# Altium PCB 175-00008 rev 3, PCB, M2 Focus Drive.PcbDoc (part 2 of 3)
Units mil, origin at the board's own origin, x right, y up, seen from the top; angles counter-clockwise.
Board outline 6885.96 x 6885.86 mil, 9 copper layers (Top Layer (*.GTL), Mid-Layer 1 (*.G1), +24V (*.GP1), GND (*.GP2), +5V (*.GP3), +12V (*.GP4), -12V (*.GP5), +3.3V (*.GP6), Bottom Layer (*.GBL)), stack 52.6 mil thick; 158 components, 158 nets, 890 pads, 380 vias.
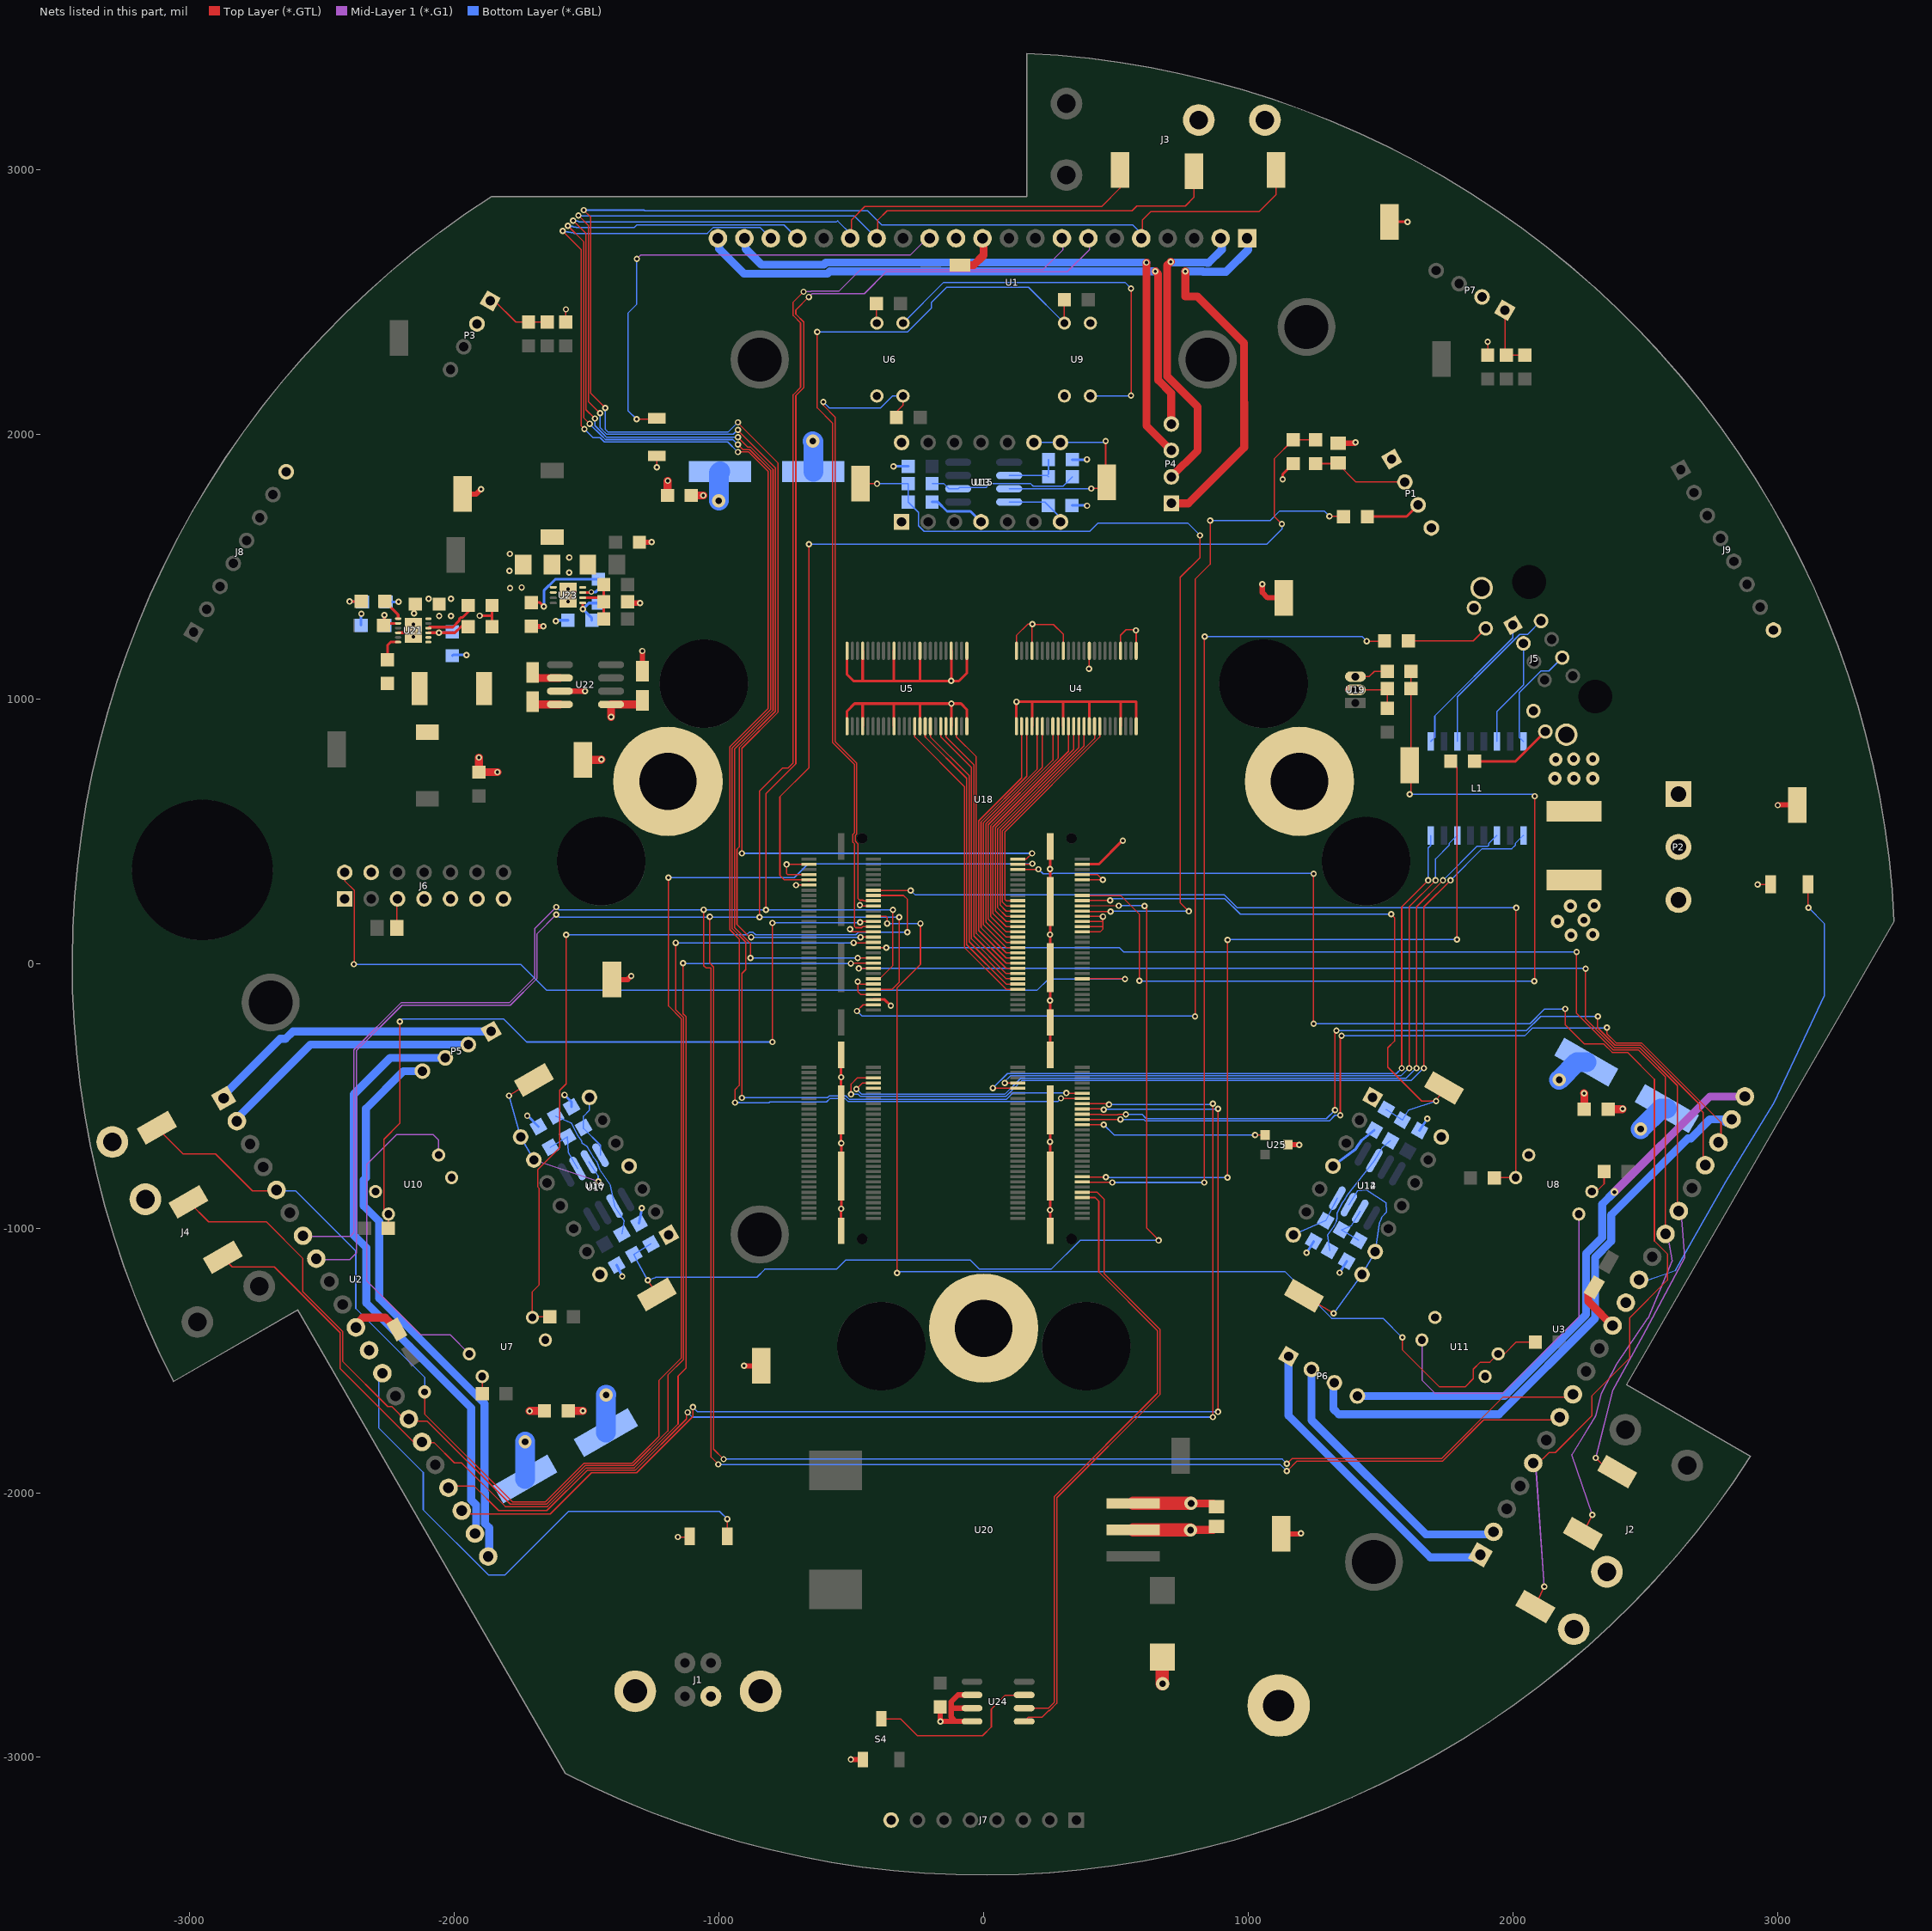
[diagram p9: the nets of this part, all layers, seen from the top]

## Via types
v1: diameter 24, hole 12, Top Layer (*.GTL) to Bottom Layer (*.GBL), 352 vias
v2: diameter 50, hole 25, Top Layer (*.GTL) to Bottom Layer (*.GBL), 22 vias
v3: diameter 25.98, hole 12.99, Top Layer (*.GTL) to Bottom Layer (*.GBL), tented top, 4 vias
v4: diameter 30, hole 15, Top Layer (*.GTL) to Bottom Layer (*.GBL), 1 vias
v5: diameter 20, hole 12, Top Layer (*.GTL) to Bottom Layer (*.GBL), 1 vias

## Nets (pads, with @x,y where several pads share a name; then routed paths per layer and width w, separated by ;. In a path a pad name is that pad's centre, name@x,y a point inside that pad or via, vN(x,y) a via of type N, cw(c..) or ccw(c..) an arc to the next point about the centre after c; other vN are vias at no path point) (continued)
+24V: C1.1 C2.1 C3.1 C4.2 C5.2 C6.2 C10.1 C15.2 C18.2 F1.2 P1.1 R29.1 R35.2 R41.2 TP16.1 U1.12 U2.12 U3.12 U18.B55 U20.1 U21.12 U23.2 | length 1185.9
  Top Layer (*.GTL) w10: U18.B55@-417.3,-135.84 -374.14,-135.84 v1(-350.98,-159) ; v1(1130,1831) 1130,1850 R41.2@1170,1890 ; TP16.1@1534.02,2804 v1(1602.02,2804)
  Top Layer (*.GTL) w30: C5.2@-1569.98,-1690 v1(-1514.98,-1690) ; C4.2@-1104.98,1770 v1(-1059.98,1770) ; v2(784.02,-2040) 867.42,-2040 C10.1@880.02,-2052.6 ; v1(2269.02,-490) 2270.02,-491 C6.2@2270.02,-550
  Top Layer (*.GTL) w50: U20.1@565.02,-2040 v2(784.02,-2040)
  Bottom Layer (*.GBL) w10: R29.1@-2007.98,1164 -2004.98,1167 v1(-1954.98,1167) ; v1(-1616.98,1295) -1613.98,1298 R35.2@-1570.98,1298
  Bottom Layer (*.GBL) w75: C2.1@-1427.4,-1771.91 -1427.4,-1630.43 v2(-1426.98,-1630) ; v2(-1000.98,1750) -1000.98,1855.18 C1.1@-996.16,1860 ; v2(2175.02,-439) 2242.11,-371.91 C3.1@2277.44,-371.91
  other v1: -2057.98,1314 -2012.98,1314 -2097.98,1379 -2012.98,1379 -1789.98,1420 -1745.98,1422 -1791.98,1485 -1790.98,1549
  other v2: 2220,107.2 2302.07,110 2169.03,160 2268.62,164 2218.11,218 2307.52,220
-12V: C16.2 C25.2 C27.2 C30.2 TP28.1 U12.7 U13.7 U14.4 U15.4 U16.7 U17.4 U18.A3 U22.5 | length 1151
  Top Layer (*.GTL) w10: U18.A3@372.86,375.97 435,375.97 524.02,465 v1(526.02,465)
  Top Layer (*.GTL) w30: TP28.1@-1514.98,770 -1446.98,770 v1(-1444.98,772) ; v1(-1407.98,933) -1408.52,933.54 U22.5@-1408.52,980 -1304.98,980 C16.2@-1289.98,995
  Bottom Layer (*.GBL) w5: U16.7@-1490.08,-505.2 -1490.08,-554.1 -1512.48,-576.5 C30.2@-1512.48,-618.97 -1512.48,-622.5 -1448.26,-686.73 U17.4@-1448.26,-723.97 ; U15.4@96.48,1745 231.02,1745 290.02,1686 U13.7@290.02,1670 ; U12.7@1170.12,-1024.81 C25.2@1292.52,-971.03 U14.4@1336.84,-886.04
CURRENT_AX1: TP1.1 U1.5 U18.A2 | length 7132.6
  Top Layer (*.GTL) w5: v1(-1511.8,2848.2) -1484.98,2821.37 -1484.98,2347 -1484.98,2155.39 v1(-1429.78,2100.19) ; v1(-928.98,2046) -928.98,2044.16 -777.98,1893.16 -777.98,1860 -777.98,1668.11 -777.98,950 -913.98,814 v1(-913.98,417) ; U18.A2@129.55,395.66 161.68,395.66 v1(183.02,417) ; U1.5@600.02,2755.89 600.02,2811 631.02,2842 1040.02,2842 1105.02,2907 TP1.1@1105.02,3000
  Bottom Layer (*.GBL) w5: v1(-1511.8,2848.2) -1283.2,2848.2 -1281,2846 -438.47,2846 -384.86,2792.39 563.52,2792.39 U1.5@600.02,2755.89 ; v1(-1429.78,2100.19) -1429.78,2019.26 -1424.25,2013.73 -1420.52,2010 -964.98,2010 v1(-928.98,2046) ; v1(-913.98,417) v1(183.02,417)
CURRENT_AX2: TP2.1 U2.5 U18.A4 | length 6413
  Top Layer (*.GTL) w5: TP2.1@-3124.98,-620 -3025.98,-719 -2902.98,-719 -2763.63,-858.35 U2.5@-2686.66,-858.35 ; v2(-2112.98,-1619) -2112.98,-1702.02 -1781,-2034 -1655.89,-2034 -1509.52,-1887.64 -1328,-1887.64 -1226.49,-1786.12 -1226.49,-1574.51 -1143.24,-1491.26 -1143.24,-207.58 -1190.98,-159.84 v1(-1190.98,325) ; U18.A4@129.55,375.97 182,375.97 v1(184.02,378)
  Bottom Layer (*.GBL) w5: U2.5@-2686.66,-858.35 -2600.65,-858.35 -2373,-1086 -2373,-1303 -2112.98,-1563.02 v2(-2112.98,-1619) ; v1(-1190.98,325) -715.98,325 -663.48,377.5 183.52,377.5 v1(184.02,378)
CURRENT_AX3: TP3.1 U3.5 U18.A6 | length 5391.2
  Top Layer (*.GTL) w5: U18.A6@129.55,356.29 206.31,356.29 v1(207.02,357) ; v1(1247.02,-227) v1(1247.02,340) ; TP3.1@2085.02,-2430 v1(2119.02,-2354) ; U3.5@2086.7,-1897.58 2136.81,-1847.48 2160.55,-1847.48 2298.02,-1710 2298.02,-1634 2442.02,-1490 2442.02,-1337.66 2584.02,-1195.66 2584.02,-1097 2535.02,-1048 2535.02,-437 2433.35,-335.33 2375.43,-335.33 2343.11,-303 2270.02,-303 2198.02,-231 v1(2198.02,-171)
  Mid-Layer 1 (*.G1) w5: U3.5@2086.7,-1897.58 v1(2119.02,-2354)
  Bottom Layer (*.GBL) w5: v1(207.02,357) 224.52,339.5 258.68,339.5 260.18,341 1246.02,341 v1(1247.02,340) ; v1(1247.02,-227) 2064.57,-227 2119.57,-172 2197.02,-172 v1(2198.02,-171)
DIRECTION1: TP7.1 U1.16 U18.B39 | length 6211.1
  Top Layer (*.GTL) w5: v1(-1551.4,2808.6) -1502.98,2760.18 -1502.98,2347 -1502.98,2094.19 v1(-1469.38,2060.6) ; v1(-928.98,1990) -890.98,1952 -880.52,1952 -795.98,1867.45 -795.98,1860 -795.98,1678.19 -795.98,957.45 -941.48,811.95 -941.48,136.33 -880.98,75.83 v1(-880.98,22) ; U1.16@-499.98,2755.89 -499.98,2811 -448.98,2862 446.02,2862 515.02,2931 TP7.1@515.02,3000 ; v1(-475.98,22) -475.62,21.64 U18.B39@-417.3,21.64
  Bottom Layer (*.GBL) w5: v1(-1551.4,2808.6) -1542.92,2808.6 -1540.72,2806.4 -1532.23,2806.4 -1530.03,2804.2 -555.89,2804.2 -552.08,2808 U1.16@-499.98,2755.89 ; v1(-1469.38,2060.6) -1469.38,2033.4 -1436.98,2001 -1425.98,1990 v1(-928.98,1990) ; v1(-880.98,22) v1(-475.98,22)
DIRECTION2: TP8.1 U2.16 U18.B41 | length 4797.8
  Top Layer (*.GTL) w5: TP8.1@-2874.98,-1110 -2874.98,-1111 -2839.98,-1146 -2680.98,-1146 -2432.16,-1394.82 -2432.16,-1530.49 -2151.68,-1810.98 -2076.02,-1810.98 -2000.16,-1886.84 -1973.16,-1886.84 -1808,-2052 -1648.43,-2052 -1502.07,-1905.64 -1320.54,-1905.64 -1154.9,-1739.99 -1154.9,-1558.45 -1125.24,-1528.79 -1125.24,-200.12 -1135.98,-189.38 v1(-1135.98,2) ; v1(-501.98,1) -501.02,1.96 U18.B41@-417.3,1.96
  Bottom Layer (*.GBL) w5: v1(-1135.98,2) -1134.98,1 v1(-501.98,1)
DIRECTION3: TP9.1 U3.16 U18.B43 | length 5038.6
  Top Layer (*.GTL) w5: v1(-471.98,-18) -471.71,-17.73 U18.B43@-417.3,-17.73 ; v1(2275.02,-19) 2275.02,-209.46 2382.89,-317.33 2478.89,-317.33 2622,-460.44 2622,-930.25 U3.16@2636.7,-944.95 ; v1(2313.02,-1868) 2365.02,-1920 TP9.1@2395.02,-1920
  Mid-Layer 1 (*.G1) w5: v1(2313.02,-1868) 2378.02,-1611 2492.02,-1405 2650.02,-1111 U3.16@2636.7,-944.95
  Bottom Layer (*.GBL) w5: v1(-471.98,-18) 2274.02,-18 v1(2275.02,-19)
DRVFAULT_AX1: U1.19 U18.A73 | length 6158
  Top Layer (*.GTL) w5: v1(-1591,2769) -1520.98,2698.98 -1520.98,2347 -1520.98,2033 v1(-1508.98,2021) ; v1(-939.98,-525) -939.98,-476 -923.98,-460 -923.98,93.38 -959.48,128.88 -959.48,819.41 -813.98,964.91 -813.98,1617 -813.98,1860 -887.98,1934 v1(-928.98,1934) ; v1(292.22,-508.8) 293.28,-509.86 U18.A73@372.86,-509.86
  Bottom Layer (*.GBL) w5: v1(-1591,2769) -1582.51,2769 -1580.31,2766.8 -1571.83,2766.8 -1569.63,2764.6 -1561.14,2764.6 -1558.94,2762.4 -1550.46,2762.4 -1548.25,2760.2 -1044.53,2760.2 -1021.58,2783.14 -845.89,2783.14 U1.19@-804.39,2741.64 ; v1(-1508.98,2021) -1476.25,1988.27 -1449.71,1988.27 -1433.43,1972 -966.98,1972 v1(-928.98,1934) ; v1(-939.98,-525) -922.14,-525 -921.64,-525.5 -811.48,-525.5 -808.48,-522.5 -593.48,-522.5 -579.78,-508.8 -524.67,-508.8 -512.17,-521.3 279.72,-521.3 v1(292.22,-508.8)
DRVFAULT_AX2: U2.19 U18.A77 | length 4732.4
  Top Layer (*.GTL) w5: U2.19@-1986.66,-2070.78 -1977.45,-2080 -1638,-2080 -1481.8,-1923.8 -1311.78,-1923.8 -1099.18,-1711.2 v1(-1099.18,-1676.2) ; U18.A77@372.86,-549.23 451.24,-549.23 v1(454.02,-552) ; v1(885.82,-548.8) 885.82,-1693.8 v1(886.02,-1694)
  Bottom Layer (*.GBL) w5: v1(-1099.18,-1676.2) -1081.38,-1694 v1(886.02,-1694) ; v1(454.02,-552) 455.32,-550.7 883.92,-550.7 v1(885.82,-548.8)
DRVFAULT_AX3: U3.19 U18.A81 | length 2984.1
  Top Layer (*.GTL) w5: U18.A81@372.86,-588.6 v1(517.02,-588.6) ; v1(1347.82,-572.8) 1347.82,-277.8 v1(1352.82,-272.8) ; v1@2355.02,-242 v1@2355.02,-243 ; v1(2356.02,-242) v1@2355.02,-243 ; U3.19@2786.7,-685.14 2786.7,-599.69 2486.35,-299.33 2390.35,-299.33 2355.02,-264 v1@2355.02,-243
  Bottom Layer (*.GBL) w5: v1(517.02,-588.6) 604.61,-588.6 610.66,-594.64 1306.02,-594.64 1327.86,-572.8 v1(1347.82,-572.8) ; v1(1352.82,-272.8) 2044.22,-272.8 2074.02,-243 2355.02,-243 v1(2356.02,-242)
EARTH: P2.3 pad.0 pad.1@0.02,-1377.97 pad.1@1193.36,688.96 pad.1@-1193.32,688.96
EMU: J6.2 U18.A47 | length 3497.1
  Top Layer (*.GTL) w5: J6.2@-2414.98,345 -2414.98,313.24 -2378.95,277.22 -2378.95,-0.98 v1(-2379.98,-2) ; U18.A47@372.86,-57.1 533.51,-57.1 v1(534.22,-57.81)
  Bottom Layer (*.GBL) w5: v1(-2379.98,-2) -2378.98,-3 -1748.91,-3 -1650.91,-101 201.57,-101 244.76,-57.81 v1(534.22,-57.81)
ETHERGND: U18.B69
ETHERLED_ACT: R17.1 U18.A103 | length 2999.1
  Top Layer (*.GTL) w5: U18.A103@372.86,-805.13 374.73,-807 v1(462.02,-807) ; v1(921.02,-808) 922.02,-807 v1(922.02,90) ; R17.1@1765.02,765 1789.02,741 v1(1789.02,91)
  Bottom Layer (*.GBL) w5: v1(462.02,-807) 463.02,-808 v1(921.02,-808) ; v1(922.02,90) 923.02,91 v1(1789.02,91)
ETHERLED_FD: R16.1 U18.A105 | length 3213.5
  Top Layer (*.GTL) w5: U18.A105@372.86,-824.82 373.54,-825.5 485.52,-825.5 486.02,-826 v1(486.02,-827) ; v1(834.02,-827) 834.02,1235 v1(835.02,1236) ; v1(1448.02,1219) 1514.02,1219 R16.1@1515.02,1220
  Bottom Layer (*.GBL) w5: v1(486.02,-827) v1(834.02,-827) ; v1(835.02,1236) 1431.02,1236 v1(1448.02,1219)
ETHERRX+: L1.11 U18.B67 | length 3268.2
  Top Layer (*.GTL) w5: v1(-480.98,-474) -457.78,-450.8 U18.B67@-417.3,-450.8 ; v1(1636.02,-395) 1636.02,215 v1(1736.02,315)
  Bottom Layer (*.GBL) w5: v1(-480.98,-474) -462.34,-492.64 80.66,-492.64 140.29,-433 1596.18,-433 1634.18,-395 v1(1636.02,-395) ; v1(1736.02,315) 1864.52,443.5 1905.21,443.5 1909.02,447.31 1909.02,454 L1.11@1940.02,485
ETHERRX-: L1.9 U18.B65 | length 3446.3
  Top Layer (*.GTL) w5: v1(-500.78,-493.8) -500.78,-454.8 -477.09,-431.11 U18.B65@-417.3,-431.11 ; v1(1664.02,-395) 1664.02,215 v1(1764.02,315)
  Bottom Layer (*.GBL) w5: v1(-500.78,-493.8) -473.91,-493.8 -466.07,-501.64 84.38,-501.64 144.02,-442 1615.18,-442 1662.18,-395 v1(1664.02,-395) ; v1(1764.02,315) 1883.52,434.5 1996.21,434.5 2009.02,447.31 2009.02,454 L1.9@2040.02,485
ETHERTX+: L1.16 U18.A70 | length 2596.4
  Top Layer (*.GTL) w5: v1(35.02,-470) 129.07,-470 U18.A70@129.55,-470.49 ; v1(1580.02,-395) 1580.02,215 v1(1680.02,315)
  Bottom Layer (*.GBL) w5: v1(35.02,-470) 90.02,-415 1560.02,-415 v1(1580.02,-395) ; v1(1680.02,315) 1680.02,437.19 1690.02,447.19 L1.16@1690.02,485
ETHERTX-: L1.14 U18.A68 | length 2560.9
  Top Layer (*.GTL) w5: v1(79.68,-451.5) 80.39,-450.8 U18.A68@129.55,-450.8 ; v1(1608.02,-395) 1608.02,215 v1(1708.02,315)
  Bottom Layer (*.GBL) w5: v1(79.68,-451.5) 79.68,-445.34 101.02,-424 1577.18,-424 1606.18,-395 v1(1608.02,-395) ; v1(1708.02,315) 1708.02,396.31 1759.02,447.31 1759.02,454 L1.14@1790.02,485
FAN_PWM: R41.1 R42.1 U18.B10 | length 3690.9
  Top Layer (*.GTL) w5: U18.B10@-660.61,316.92 -753.52,316.92 -770,333.39 -770,631 -660,741 v1(-660,1586) ; v1(1127,1662) 1098,1691 1098,1908 R41.1@1170,1980 R42.1@1255,1980
  Top Layer (*.GTL) w10: U18.B10@-661.69,318 U18.B10@-660.61,316.92
  Bottom Layer (*.GBL) w5: v1(-660,1586) 1071,1586 1127,1642 v1(1127,1662)
FAN_TACH: R19.1 U18.B57 | length 3782.9
  Top Layer (*.GTL) w5: v1(-479,-179) -455.52,-155.52 U18.B57@-417.3,-155.52 ; v1(799,-199) 799,1453 856,1510 v1(856,1675) ; v1(1307,1691) 1359.02,1691 R19.1@1360.02,1690
  Bottom Layer (*.GBL) w5: v1(-479,-179) -461,-197 797,-197 v1(799,-199) ; v1(856,1675) 1083,1675 1119,1711 1287,1711 v1(1307,1691)
FULL_STEP_AX1: U1.18 U18.A71 | length 6197.6
  Top Layer (*.GTL) w5: v1(-1571.2,2788.8) -1511.98,2729.58 -1511.98,2347 -1511.98,2063.6 v1(-1489.18,2040.8) ; v1(-928.98,1962) -909.98,1943 -884.25,1943 -804.98,1863.73 -804.98,1860 -804.98,1620.73 -804.98,961.18 -950.48,815.68 -950.48,132.61 -899.48,81.61 -899.48,-22.67 -913.98,-37.17 v1(-913.98,-507) ; v1(312.02,-489) 313.19,-490.17 U18.A71@372.86,-490.17
  Bottom Layer (*.GBL) w5: v1(-1571.2,2788.8) -1562.72,2788.8 -1560.51,2786.6 -1552.03,2786.6 -1549.83,2784.4 -1541.34,2784.4 -1539.14,2782.2 -1320.67,2782.2 -1310.72,2792.14 -754.89,2792.14 U1.18@-704.39,2741.64 ; v1(-1489.18,2040.8) -1489.18,2040.47 -1443.34,1994.63 -1429.71,1981 -947.98,1981 v1(-928.98,1962) ; v1(-913.98,-507) -913.62,-506.64 -590.34,-506.64 -583.51,-499.8 -520.94,-499.8 -508.44,-512.3 86.45,-512.3 109.75,-489 v1(312.02,-489)
FULL_STEP_AX2: U2.18 U18.A75 | length 4790.1
  Top Layer (*.GTL) w5: U2.18@-2036.66,-1984.18 -2027.48,-1975 -1925,-1975 -1833,-2067 -1650.7,-2067 -1498.5,-1914.8 -1419.98,-1914.8 -1419.82,-1914.64 -1419.65,-1914.8 -1316.98,-1914.8 -1123.32,-1721.14 -1123.32,-1700.34 v1(-1118.98,-1696) ; U18.A75@372.86,-529.54 v1@471.16,-529.54 ; v1(866.22,-1713.8) v1@866.22,-529.2
  Bottom Layer (*.GBL) w5: v1(-1118.98,-1696) -1101.18,-1713.8 v1(866.22,-1713.8) ; v1(473.82,-532.2) v1@862.82,-532.2
  other v1: 866.02,-529
FULL_STEP_AX3: U3.18 U18.A79 | length 3092.1
  Top Layer (*.GTL) w5: U18.A79@372.86,-568.91 444.77,-568.91 446.36,-570.5 507.11,-570.5 508.41,-569.2 v1(537.23,-569.2) ; v1(1328.02,-553) 1328.02,-258 v1(1333.02,-253) ; v1@2320.02,-199 v1@2320.02,-200 ; v1(2321.02,-199) v1@2320.02,-200 ; U3.18@2736.7,-771.75 2720.02,-755.06 2720.02,-563 2706.66,-549.64 2706.66,-532.37 2482.62,-308.33 2386.62,-308.33 2320.02,-241.73 v1@2320.02,-200
  Bottom Layer (*.GBL) w5: v1(537.23,-569.2) 597.95,-569.2 614.38,-585.64 1295.38,-585.64 v1(1328.02,-553) ; v1(1333.02,-253) 2051.29,-253 2105.29,-199 v1(2321.02,-199)
GND: C1.2 C2.2 C3.2 C4.1 C5.1 C6.1 C7.2 C8.2 C9.2 C10.2 C12.NEG C13.1 C14.1 C15.1 C16.1 C18.1 C19.1 C21.2 C22.1 C23.1 C24.1 C25.1 C26.1 C27.1 C28.1 C29.1 C30.1 C31.1 C32.1 C33.1 C34.1 J1.4 J1.5 J1.6 J2.1 J3.1 J4.1 J5.9 J5.11 J5.13 J5.14 J6.1 J6.4 J6.7 J6.9 J6.11 J6.13 J7.8 J8.8 J9.8 P1.4 P2.2 P3.2 P7.2 R7.1 R9.1 R13.1 R30.1 R31.1 R34.1 R38.1 R39.1 R40.1 S1.1 S2.1 S3.1 S4.1 TP21.1 TP22.1 TP23.1 TP24.1 TP25.1 TP26.1 U1.11 U2.11 U3.11 U4.1 U4.4 U4.10 U4.15 U4.21 U4.24 U4.25 U4.28 U4.34 U4.39 U4.45 U4.48 U5.1 U5.4 U5.10 U5.15 U5.21 U5.24 U5.25 U5.28 U5.34 U5.39 U5.45 U5.48 U6.E U7.E U8.E U9.E U9.K U10.E U10.K U11.E U11.K U12.1 U12.4 U13.1 U13.4 U16.1 U16.4 U18.A7 U18.A9 U18.A23 U18.A25 U18.A27 U18.A29 U18.A121 U18.A122 U18.B4 U18.B8 U18.B12 U18.B19 U18.B29 U18.B49 U18.B53 U18.B122 U19.3 U20.2 U21.4 U21.13 U22.3 U23.8 U23.9 U24.2 U24.3 U24.4 U25.3 | length 11502.2
  Top Layer (*.GTL) w5: C32.1@-1579.98,2425 -1579.98,2472 v1(-1578.98,2473) ; v1(-1234.98,1876) S1.1@-1234.98,1919 ; v1(-1155.98,-2167) -1112.98,-2167 S2.1@-1110.98,-2165 ; v1(-708.98,297) -708.74,297.23 U18.B12@-660.61,297.23 ; U18.B8@-660.61,336.6 -740.58,336.6 -744.98,341 v1(-744.98,375) -744,375.97 U18.B4@-660.61,375.97 ; v1@-507.98,130 -498.05,120.07 U18.B29@-417.3,120.07 ; v1(-467.98,221.5) -467.98,220 -466.47,218.49 U18.B19@-417.3,218.49 ; U18.B53@-417.3,-116.15 -464.83,-116.15 -475.98,-105 v1(-475.98,-68) -467.2,-76.78 U18.B49@-417.3,-76.78 ; U4.48@123.64,1182.71 123.64,1240.64 166,1283 v1(184,1283) v1@183,1282 ; U4.45@182.7,1182.71 182.7,1281.7 v1@183,1282 ; U4.39@300.81,1182.71 300.81,1245.19 264,1282 v1@183,1282 ; U18.A29@372.86,120.07 440.09,120.07 451.02,131 v1(451.02,178) 451.02,179 450.9,179.12 U18.A23@372.86,179.12 ; U18.A27@372.86,139.75 450.77,139.75 ; U18.A25@372.86,159.44 450.58,159.44 ; U18.A9@372.86,316.92 449.94,316.92 v1(450.02,317) 430.42,336.6 U18.A7@372.86,336.6 ; v1(398,1115) 399.23,1116.23 U4.34@399.23,1182.71 ; U4.28@517.34,1182.71 517.34,1241.34 538,1262 v1@575,1262 ; v1(576,1260) 576.4,1259.6 U4.25@576.4,1182.71 ; U19.3@1405.02,1085 1457.02,1085 1477.02,1105 C31.1@1525.02,1105 ; C33.1@1905.02,2300 v1(1905.02,2350) ; v1(2925.02,299) 2926.02,300 S3.1@2974.02,300
  Top Layer (*.GTL) w10: U21.4@-2212.98,1250.85 -2164.75,1250.85 U21.13@-2155.89,1259.71 ; v1(-1904.98,1315) -1857.98,1315 ; R30.1@-1857.98,1274 -1857.98,1315 ; R31.1@-1857.98,1354 -1857.98,1315 ; U18.B122@-538.96,-1009.66 v1(-538.98,-926) -537.98,-925 v1(-537.98,-678) -538.98,-677 v1(-538.98,-429) ; v1(-538.98,-429) U18.B122@-538.96,-344.7 ; U5.1@-516.36,897.28 -516.36,954.62 -487.98,983 v1(-121.98,983) ; U5.48@-516.36,1182.71 -516.36,1092.38 -491.98,1068 -93.98,1068 -63.6,1098.38 U5.25@-63.6,1182.71 ; U5.4@-457.3,897.28 -457.3,981.67 ; -457.3,1069.67 U5.45@-457.3,1182.71 ; U5.10@-339.19,897.28 -339.19,980.21 ; -339.19,1068.78 U5.39@-339.19,1182.71 ; U5.15@-240.77,897.28 -240.77,980.78 ; -240.77,1069.21 U5.34@-240.77,1182.71 ; U5.21@-122.66,897.28 -122.66,982.32 v1(-121.98,983) ; v1(-122.66,1068.67) U5.28@-122.66,1182.71 ; U5.24@-63.6,897.28 -63.6,960.62 -85.98,983 v1(-121.98,983) ; U4.1@123.64,897.28 v1(123.64,990) 182.7,990 ; U4.4@182.7,897.28 182.7,990 ; U18.A122@251.02,-1009.48 v1(251.02,-931) v1(251.02,-673) 251.2,-672.82 U18.A122@251.2,-552.18 ; U18.A121@251.02,-14.6 v1(251.02,110) v1(251.02,358) 251.2,358.18 U18.A121@251.2,442.7 ; U18.A122@251.2,-344.7 251.02,-344.52 v1(251.02,-139) 251.2,-138.82 U18.A121@251.2,-14.78 ; U4.10@300.81,897.28 300.81,990 ; U4.15@399.23,897.28 399.23,990 ; U4.21@517.34,897.28 517.34,990 ; U4.24@576.4,897.28 576.4,990 517.34,990 ; 182.7,990 300.81,990 ; 300.81,990 399.23,990 ; 399.23,990 517.34,990
  Top Layer (*.GTL) w20: TP26.1@-1969.98,1775 -1917.98,1775 v1(-1899.98,1793) ; R40.1@-1709.98,1275 v1(-1663.98,1275) ; U22.3@-1601.44,1030 v1(-1506.98,1030) ; TP21.1@-1404.98,-60 -1344.98,-60 v1(-1331.98,-47) ; R39.1@-1345.98,1368 -1340.98,1363 v1(-1298.98,1363) ; R38.1@-1300.98,1593 -1255.98,1593 v1(-1254.98,1594) ; C16.1@-1289.98,1105 v1(-1289.98,1182) ; v1(-905.98,-1520) TP22.1@-839.98,-1520 ; v1(-502,-3008) -501.87,-3007.87 S4.1@-456.09,-3007.87 ; C34.1@-164.4,-2809 -164.4,-2862.6 v1(-163,-2864) -106,-2864 ; U24.4@-43.85,-2864 -106,-2864 ; U24.3@-43.85,-2814 -121,-2814 -123,-2816 ; U24.2@-43.85,-2764 -97,-2764 -123,-2790 -123,-2816 ; v1(1053.02,1434) 1053.02,1403 1073.02,1383 TP25.1@1134.02,1383 ; TP23.1@1125.02,-2155 1197.02,-2155 v1(1199.02,-2153) ; U25.3@1149.09,-684.65 1192.65,-684.65 v1(1193,-685) ; C21.2@1340,1967.03 1402.04,1967.03 v1(1405,1970) ; v1(3001.02,599) 3002.02,600 TP24.1@3075.02,600 ; -123,-2816 -123,-2847 -106,-2864
  Top Layer (*.GTL) w30: U2.11@-2386.66,-1377.96 -2346.7,-1338 -2261.85,-1338 C8.2@-2217.48,-1382.37 ; v1(-1907.98,779) C13.1@-1907.98,724 v1(-1837.98,724) ; v1(-1715.98,-1691) -1714.98,-1690 C5.1@-1659.98,-1690 ; C4.1@-1194.98,1770 -1194.98,1824 v1(-1193.98,1825) ; C7.2@-89.98,2640 -37.98,2640 0.02,2678 U1.11@0.02,2755.89 ; v2@781.02,-2140 867.42,-2140 C10.2@880.02,-2127.4 ; C9.2@2307.52,-1222.63 2285.02,-1245.13 2285.02,-1276.28 U3.11@2386.7,-1377.96 ; C6.1@2360.02,-550 2414.02,-550 v1(2415.02,-549)
  Top Layer (*.GTL) w50: U20.2@565.02,-2140 781.02,-2140 v2(782.02,-2141) ; C12.NEG@675.02,-2621 675.02,-2721 v2(676.02,-2722)
  Mid-Layer 1 (*.G1) w5: J2.1@2303.72,-2298.57 J2.1@2355.26,-2298.57
  Bottom Layer (*.GBL) w10: R34.1@-2352.98,1279 -2352.98,1321 v1(-2351.98,1322) ; C14.1@-2257.98,1367 -2211.98,1367 v1(-2210.98,1368) ; v1(-1724.98,-575) -1723.51,-575 R13.1@-1682.48,-616.03 ; v1(-1583.98,-496) -1557.48,-522.5 C30.1@-1557.48,-541.03 ; C28.1@-1387.48,-1138.97 v1(-1365.98,-1182) ; C29.1@-1302.48,-981.03 v1(-1291.98,-924) ; v1(-340.98,1879) -339.98,1880 C23.1@-284.98,1880 ; C26.1@-194.98,1745 -172.98,1745 -137.98,1710 -49.98,1710 U13.4@-9.98,1670 ; C27.1@334.02,1732 390.02,1732 v1(391.02,1731) ; R9.1@335.02,1905 389.02,1905 v1(390.02,1906) ; v1(1220.02,-1093) C25.1@1247.52,-1048.97 ; U12.4@1320.12,-765 1405.02,-702 1408.02,-697 1429.02,-667 C24.1@1476.52,-628.97 ; v1(1345.02,-1168) R7.1@1372.52,-1123.97 ; C22.1@1647.52,-631.03 v1(1677.02,-586)
  Bottom Layer (*.GBL) w75: v2(-1732.98,-1807) -1732.56,-1807.43 C2.2@-1732.56,-1948.09 ; v2(-645.98,1975) -643.8,1972.82 C1.2@-643.8,1860 ; v2(2483.02,-625) 2559.93,-548.09 C3.2@2582.6,-548.09
  other v1: -504.98,130 -2152.98,1324 -1567,1478 -1566,1535
  other v3: -2155.89,1236.08 -2155.89,1283.33 -1570.98,1369.38 -1570.98,1416.62
I2C_SCL: U18.A111 U24.6 | length 2338.6
  Top Layer (*.GTL) w5: U24.6@153,-2814 245,-2814 267,-2792 267,-2014 657,-1624 657,-1387.12 435,-1165.12 435,-898 420.87,-883.87 U18.A111@372.86,-883.87
I2C_SDA: U18.A109 U24.5 | length 2399.5
  Top Layer (*.GTL) w5: U24.5@153,-2864 168.19,-2848.81 220.19,-2848.81 246,-2823 248.73,-2823 276,-2795.73 276,-2793 277,-2792 277,-2018.14 667,-1628.14 667,-1382.98 454.69,-1170.66 454.69,-889.85 429.02,-864.19 U18.A109@372.86,-864.19
INDEX1+: U4.12 U18.A26 | length 922
  Top Layer (*.GTL) w5: U18.A26@129.55,159.44 85.02,159.44 44.02,200.44 44.02,513.52 340.18,809.68 U4.12@340.18,897.28
INDEX1-: U4.11 U18.A28 | length 941
  Top Layer (*.GTL) w5: U18.A28@129.55,139.75 85.02,139.75 35.02,189.75 35.02,517.25 320.49,802.72 U4.11@320.49,897.28
INDEX2+: U4.3 U18.A38 | length 1011.5
  Top Layer (*.GTL) w5: U18.A38@129.55,41.33 85.02,41.33 -9.98,136.33 -9.98,535.89 163.01,708.88 U4.3@163.01,897.28
INDEX2-: U4.2 U18.A40 | length 1030.5
  Top Layer (*.GTL) w5: U18.A40@129.55,21.64 85.02,21.64 -18.98,125.64 -18.98,539.61 143.33,701.92 U4.2@143.33,897.28
INDEX3+: U5.16 U18.A50 | length 1145.4
  Top Layer (*.GTL) w5: U5.16@-221.08,897.28 -221.08,857.19 -63.98,700.09 -63.98,72.22 85.02,-76.78 U18.A50@129.55,-76.78
INDEX3-: U5.14 U18.A52 | length 1181.4
  Top Layer (*.GTL) w5: U5.14@-260.45,897.28 -260.45,857.19 -72.98,669.72 -72.98,61.53 85.02,-96.47 U18.A52@129.55,-96.47
IR_TEMP1: C26.2 R12.2 TP11.1 U18.A21 | length 3329.8
  Top Layer (*.GTL) w5: TP11.1@-464.98,1815 -463.98,1814 v1(-402.98,1814) ; U18.A21@372.86,198.81 374.66,197 v1(480.02,197) ; v1(775.02,198) 743.02,230 743.02,1460.19 818.02,1535.19 v1(818.02,1619)
  Bottom Layer (*.GBL) w5: v1(-402.98,1814) -401.98,1815 R12.2@-284.98,1815 C26.2@-284.98,1745 -246.01,1706.02 -246.01,1655.07 -224.9,1633.97 400.83,1633.97 431.36,1664.5 772.52,1664.5 v1(818.02,1619) ; v1(480.02,197) 481.02,198 v1(775.02,198)
IR_TEMP2: C29.2 R15.2 TP14.1 U18.A19 | length 3795.5
  Top Layer (*.GTL) w5: v1(-1268.98,-1197) TP14.1@-1234.98,-1250 ; U18.A19@372.86,218.49 v1(511.02,219) ; v1@608,219 616,211 616,-998.98 663.02,-1046 v1(661.02,-1046)
  Bottom Layer (*.GBL) w5: C29.2@-1257.48,-1058.97 R15.2@-1322.48,-1098.97 -1302.98,-1135 v1(-1268.98,-1197) -1240.98,-1187 -1238.98,-1185 -857.19,-1185 -827.19,-1155 -556.62,-1155 -521.62,-1120 -50.5,-1120 -15.5,-1155 255.06,-1155 364.06,-1046 v1(661.02,-1046) ; v1(511.02,219) 607,219 v1(608,218)
IR_TEMP3: C24.2 R11.2 TP10.1 U18.A17 | length 2307.4
  Top Layer (*.GTL) w5: U18.A17@372.86,238.18 373.68,239 v1(478.02,239) ; v1(1540.02,187) 1552.52,174.5 1552.52,-293 1527.52,-318 1527.52,-390.67 1655.86,-519 v1(1710.02,-519) TP10.1@1740.02,-470
  Bottom Layer (*.GBL) w5: v1(478.02,239) 484.02,245 912.02,245 970.02,187 v1(1540.02,187) ; C24.2@1521.52,-551.03 R11.2@1582.52,-591.03 1606.02,-553 v1(1710.02,-519)
NEGLIMT1: R26.1 U9.C U18.B27 | length 3546.1
  Top Layer (*.GTL) w5: v1(-628.98,2388) -628.98,2101 -570.98,2043 -570.98,836 -488.98,754 -488.98,493.98 -494.22,488.74 -494.22,459.27 -488.98,454.03 -488.98,141 -483.98,136 -460.82,136 -457.06,139.75 U18.B27@-417.3,139.75 ; R26.1@305.02,2510 305.02,2421.37 U9.C@305.14,2421.25
  Bottom Layer (*.GBL) w5: v1(-628.98,2388) -287.98,2388 -196.98,2479 -196.98,2500 -139.98,2557 169.39,2557 U9.C@305.14,2421.25
NEGLIMT2: R27.1 U10.C U18.B25 | length 3083.2
  Top Layer (*.GTL) w5: R27.1@-2249.98,-1000 -2249.98,-946.97 -2266.98,-929.97 -2266.98,-664 -2206.98,-604 v1(-2206.98,-219) ; v1(-797.98,-296) v1(-797.98,154) ; v1(-466.98,156) -463.54,159.44 U18.B25@-417.3,159.44 U18.B25@-418.74,158
  Bottom Layer (*.GBL) w5: -2199.13,-209.16 -1814.53,-209.16 -1727.68,-296 v1(-797.98,-296) ; v1@-796.98,155 v1@-466.98,155
NEGLIMT3: R28.1 U11.C U18.B23 | length 4273.1
  Top Layer (*.GTL) w5: U18.B23@-417.3,179.12 -369.1,179.12 -364.98,175 v1(-364.98,152) ; v1(-326.98,-1169) -326.98,-90.73 -238.98,-2.73 v1(-238.98,152) ; v1(1582.02,-1413) 1582.02,-1459 1723.02,-1600 1819.21,-1600 1850.49,-1568.72 1850.49,-1532.51 1876.84,-1506.16 1913.05,-1506.16 U11.C@1944.33,-1474.88 1968.14,-1474.88 2013.02,-1430 R28.1@2085.02,-1430
  Bottom Layer (*.GBL) w5: v1(-364.98,152) v1(-238.98,152) ; v1(-326.98,-1169) -325.98,-1169 -321.75,-1164.77 1139.63,-1164.77 1315.36,-1340.5 1509.52,-1340.5 v1(1582.02,-1413)
NetC11_1: C11.1 D1.2 L2.1 U21.8
NetC11_2: C11.2 U21.6 | length 79.7
  Top Layer (*.GTL) w10: C11.2@-2252.98,1169 -2252.98,1204 -2241.56,1215.41 U21.6@-2212.98,1215.41
NetC14_2: C14.2 R33.1 | length 93.8
  Top Layer (*.GTL) w10: v1(-2396.98,1369) R33.1@-2352.98,1369
  Bottom Layer (*.GBL) w10: v1(-2396.98,1369) -2349.98,1369 C14.2@-2347.98,1367
NetC17_1: C17.1 U22.2 | length 111.8
  Top Layer (*.GTL) w30: C17.1@-1704.98,1100 -1684.98,1080 U22.2@-1601.44,1080
NetC17_2: C17.2 U22.4 | length 107.7
  Top Layer (*.GTL) w30: C17.2@-1704.98,990 -1694.98,980 U22.4@-1601.44,980
NetC20_1: C20.1 R36.1 R39.2 U23.6 | length 215.7
  Top Layer (*.GTL) w10: U23.6@-1515.37,1383.15 -1451.14,1383.15 R39.2@-1435.98,1368 ; C20.1@-1435.98,1303 R39.2@-1435.98,1368 ; R36.1@-1435.98,1433 R39.2@-1435.98,1368
NetC21_1: C21.1 P1.2 R42.2 | length 365.8
  Top Layer (*.GTL) w5: R42.2@1255,1890 1337.77,1890 1407.37,1820.4 P1.2@1592,1820.4
NetD1_1: D1.1 U21.7
NetF1_1: F1.1 P2.1
  other v2: 2159.13,700 2231,700 2302.07,700 2162,772 2229.67,774 2302.07,774
NetJ2_2: J2.2 U12.14
NetJ3_2: J3.2 U13.14
NetJ4_2: J4.2 U16.14
NetJ5_1: J5.1 L1.1 | length 568.4
  Bottom Layer (*.GBL) w5: L1.1@1690.02,840 1705.14,855.12 1705.14,936.64 2000.02,1231.53 J5.1@2000.02,1280
NetJ5_2: J5.2 L1.3 | length 604.1
  Bottom Layer (*.GBL) w5: L1.3@1790.02,840 1790.02,1008.8 2025.94,1244.72 2055.98,1244.72 J5.2@2106.62,1295.36
NetJ5_3: J5.3 L1.6 | length 412.1
  Bottom Layer (*.GBL) w5: L1.6@1940.02,840 1940.02,952.96 2040.02,1052.96 J5.3@2040.02,1210.72
NetJ5_6: J5.6 L1.8 | length 408.3
  Bottom Layer (*.GBL) w5: L1.8@2040.02,840 2024.14,855.88 2024.14,1024.35 2105.94,1106.15 2135.98,1106.15 J5.6@2186.62,1156.79
NetJ5_10: J5.10 R16.2 | length 312.3
  Top Layer (*.GTL) w5: R16.2@1605.02,1220 1850.61,1220 J5.10@1897.75,1267.14
NetJ5_12: J5.12 R17.2 | length 314.3
  Top Layer (*.GTL) w10: R17.2@1855.02,765 2010.32,765 J5.12@2122.75,877.43
NetJ6_5: J6.5 R18.1 | length 106.1
  Top Layer (*.GTL) w5: R18.1@-2217.58,140 -2217.58,242.4 J6.5@-2214.98,245
NetL3_1: L3.1 U23.1
NetP1_3: P1.3 R19.2 | length 210.1
  Top Layer (*.GTL) w10: R19.2@1450.02,1690 1598.21,1690 P1.3@1642,1733.79
NetP3_1: P3.1 R23.2 R24.2 | length 248.1
  Top Layer (*.GTL) w5: P3.1@-1864.98,2505 -1847.98,2505 -1767.98,2425 R23.2@-1719.98,2425 R24.2@-1649.98,2425
NetP4_1: P4.1 U1.1 | length 1479
  Top Layer (*.GTL) w30: P4.1@709.02,1740 774.02,1740 985,1950.98 985,2120.53 984.27,2121.25 984.27,2345.73 808,2522 762.02,2522 v1(762.02,2617)
  Bottom Layer (*.GBL) w30: v1@762.02,2616.5 827.93,2616.5 829.43,2615 916.02,2615 1000.02,2699 U1.1@1000.02,2755.89
NetP4_2: P4.2 U1.2 | length 1179.1
  Top Layer (*.GTL) w30: v1(707.02,2653) 693.48,2639.45 693.48,2220.08 809.02,2104.53 809.02,1940 P4.2@709.02,1840
  Bottom Layer (*.GBL) w30: v1@707.02,2650.5 842.01,2650.5 843.51,2649 850.02,2649 900.02,2699 U1.2@900.02,2755.89
NetP4_3: P4.3 U1.20 | length 2346.2
  Top Layer (*.GTL) w30: v1(615.02,2650) 615.02,2034 P4.3@709.02,1940
  Bottom Layer (*.GBL) w30: U1.20@-899.98,2755.89 -899.98,2702 -839.98,2642 -604.5,2642 -596,2650.5 v1@615.02,2650.5
NetP4_4: P4.4 U1.21 | length 2347.2
  Top Layer (*.GTL) w30: v1(649.02,2617) 659.48,2606.54 659.48,2205.99 709.02,2156.45 P4.4@709.02,2040
  Bottom Layer (*.GBL) w30: U1.21@-999.98,2755.89 -999.98,2702 -905.98,2608 -590.42,2608 -581.92,2616.5 v1@649.02,2616.5
NetP5_1: P5.1 U2.1 | length 1131.3
  Bottom Layer (*.GBL) w30: U2.1@-2886.66,-511.94 -2658.84,-284.11 -2638.19,-284.11 -2610.06,-255.99 P5.1@-1861.36,-255.99
NetP5_2: P5.2 U2.2 | length 1009.9
  Bottom Layer (*.GBL) w30: U2.2@-2836.66,-598.54 -2544.11,-305.99 P5.2@-1947.97,-305.99
NetP5_3: P5.3 U2.20 | length 2256.8
  Bottom Layer (*.GBL) w30: P5.3@-2034.57,-355.99 -2242.97,-355.99 -2380.86,-493.88 -2380.86,-1026.08 -2333.37,-1073.57 -2333.37,-1282.63 -1936.66,-1679.34 -1936.66,-2027.07 -1918.59,-2045.15 -1918.59,-2150.12 U2.20@-1922.59,-2154.12
NetP5_4: P5.4 U2.21 | length 2166.5
  Bottom Layer (*.GBL) w30: P5.4@-2121.17,-405.99 -2192.97,-405.99 -2335,-548.02 -2335,-809.54 -2342.62,-817.16 -2342.62,-915.42 -2284.16,-973.88 -2284.16,-1264.84 -1886.66,-1662.34 -1886.66,-1998.34 -1884.59,-2000.41 -1884.59,-2115.75 -1868.59,-2131.75 -1868.59,-2236.72 U2.21@-1872.59,-2240.72
NetP6_1: P6.1 U3.1 | length 1180.5
  Bottom Layer (*.GBL) w30: P6.1@1152.41,-1484.01 1152.41,-1708.39 1688.01,-2243.99 U3.1@1886.7,-2243.99
NetP6_2: P6.2 U3.2 | length 1067.8
  Bottom Layer (*.GBL) w30: P6.2@1239.01,-1534.01 1239.01,-1724.99 1671.41,-2157.39 U3.2@1936.7,-2157.39
NetP6_3: P6.3 U3.20 | length 2300.9
  Bottom Layer (*.GBL) w30: P6.3@1325.61,-1584.01 1322.02,-1587.6 1322.02,-1683 1342.02,-1703 1948.1,-1703 2311.02,-1340.09 2311.02,-1110.09 2372.01,-1049.09 2372.01,-949.99 2661.76,-660.24 2673.07,-660.24 2744.78,-588.53 U3.20@2827.04,-588.53 ; U3.20@2804.01,-598.54 U3.20@2836.7,-598.54
NetP6_4: P6.4 U3.21 | length 2152.1
  Mid-Layer 1 (*.G1) w30: v4(2384,-863) 2745.07,-501.93 U3.21@2877.04,-501.93
  Bottom Layer (*.GBL) w30: P6.4@1412.21,-1634.01 1969.01,-1634.01 2277.02,-1326 2277.02,-1096 2338.01,-1035.01 2338.01,-908.99 v4(2384,-863) ; U3.21@2879.77,-505 U3.21@2886.7,-511.94
NetP7_1: P7.1 R22.2 R25.2 | length 242.1
  Top Layer (*.GTL) w5: P7.1@1970.02,2470 1970.02,2305 R25.2@1975.02,2300 R22.2@2045.02,2300
NetR1_1: R1.1 U6.A | length 74.4
  Top Layer (*.GTL) w5: R1.1@-404.98,2495 -404.98,2422.7 U6.A@-403.52,2421.25
NetR2_1: R2.1 U7.A | length 64.8
  Top Layer (*.GTL) w5: R2.1@-1894.98,-1625 U7.A@-1894.98,-1560.22
NetR3_1: R3.1 U8.A | length 105.4
  Top Layer (*.GTL) w5: U8.A@2298.67,-861.16 2315.86,-861.16 2345.02,-832 R3.1@2345.02,-785
NetR7_2: R7.2 R8.1 U14.2 | length 180.6
  Bottom Layer (*.GBL) w5: R7.2@1417.52,-1046.03 R8.1@1352.52,-1006.03 1390.02,-990 U14.2@1423.44,-936.04
NetR8_2: R8.2 R11.1 U14.6 | length 494.7
  Bottom Layer (*.GBL) w5: R8.2@1307.52,-1083.97 1300.02,-1025 1325.08,-990.56 1333.17,-972.89 1336.02,-961 1335.02,-942 1356.26,-902.24 1363.02,-894 1374.6,-874.59 U14.6@1476.6,-743.97 1507.02,-694 R11.1@1537.52,-668.97
NetR9_2: R9.2 R10.1 U15.2 | length 212.7
  Bottom Layer (*.GBL) w5: U15.2@96.48,1845 R10.1@240.02,1845 ; R10.1@245.02,1840 R10.1@240.02,1845 ; R9.2@245.02,1905 245.02,1850 R10.1@240.02,1845
NetR10_2: R10.2 R12.1 U15.6 | length 565.4
  Bottom Layer (*.GBL) w5: R12.1@-194.98,1815 -150.98,1815 -130.98,1795 U15.6@-96.44,1795 -91.44,1800 9.02,1800 24.3,1815.28 176.8,1815.28 187.08,1805 300.02,1805 R10.2@335.02,1840
NetR13_2: R13.2 R14.1 U17.2 | length 205.9
  Bottom Layer (*.GBL) w5: R13.2@-1637.48,-693.97 R14.1@-1572.48,-653.97 -1569.98,-714 U17.2@-1534.86,-773.97
NetR14_2: R14.2 R15.1 U17.6 | length 543.4
  Bottom Layer (*.GBL) w5: R14.2@-1617.48,-576.03 -1558.98,-602 -1533.98,-650 -1520.12,-668.62 -1517.98,-679 -1497.98,-692 -1474.98,-732 -1469.91,-737.94 -1462.98,-747 -1460.33,-750 -1460.09,-754.12 -1454.04,-768 -1451.98,-777 -1409.98,-839 U17.6@-1395.1,-916.04 -1358.98,-972 R15.1@-1367.48,-1021.03
NetR20_2: R20.2 R21.2 U19.2 | length 197.1
  Top Layer (*.GTL) w5: U19.2@1405.02,1035 1520.02,1035 R21.2@1525.02,1040 R20.2@1525.02,965
NetR29_2: R29.2 R30.2 U21.9 | length 212.9
  Top Layer (*.GTL) w10: U21.9@-2098.81,1250.85 v1@-2059.13,1250.85 ; v1(-2058.98,1251) v1@-2059.13,1250.85 ; R30.2@-1947.98,1274 -1974.98,1274 -1998.13,1250.85 v1@-2059.13,1250.85
  Bottom Layer (*.GBL) w10: v1(-2058.98,1251) -2010.98,1251 R29.2@-2007.98,1254
NetR31_2: R31.2 U21.10 | length 204.2
  Top Layer (*.GTL) w10: U21.10@-2098.81,1268.56 -2095.37,1272 -2005.98,1272 -1981.98,1296 -1981.98,1302.73 -1976.71,1308 -1969.98,1308 -1947.98,1330 R31.2@-1947.98,1354
NetR32_1: R32.1 R34.2 U21.2 | length 129.6
  Top Layer (*.GTL) w10: v1(-2264.98,1318) -2264.98,1282 -2260.7,1286.28 U21.2@-2212.98,1286.28
  Bottom Layer (*.GBL) w10: v1(-2264.98,1318) -2264.98,1281 R34.2@-2262.98,1279
NetR33_2: R33.2 U21.1 | length 85.7
  Top Layer (*.GTL) w10: R33.2@-2262.98,1369 -2212.98,1319 U21.1@-2212.98,1304
NetR35_1: R35.1 R37.2 U23.5 | length 148.2
  Top Layer (*.GTL) w10: U23.5@-1515.37,1363.47 -1515.37,1340.39 v1(-1514.98,1340)
  Bottom Layer (*.GBL) w10: R35.1@-1480.98,1298 -1480.98,1306 v1(-1514.98,1340) -1491.98,1363 R37.2@-1455.98,1363
NetR37_1: R37.1 R40.2 U23.7 | length 440.7
  Top Layer (*.GTL) w10: R40.2@-1710.98,1383 R40.2@-1710.82,1383.15 ; R40.2@-1709.98,1365 -1676.98,1365 v1(-1661.98,1350) ; U23.7@-1515.37,1402.84 -1485.16,1402.84 v5(-1483,1405)
  Bottom Layer (*.GBL) w10: v1(-1661.98,1350) -1661.98,1410 -1618.98,1453 R37.1@-1455.98,1453 -1455.98,1415.02 -1466,1405 v5(-1483,1405)
NetS1_2: S1.2 U1.13 | length 1860.7
  Top Layer (*.GTL) w5: v1(-1311.98,2058) -1237.98,2058 S1.2@-1234.98,2061
  Mid-Layer 1 (*.G1) w5: v1(-1310.98,2664) -1296.98,2678 -277.87,2678 U1.13@-199.98,2755.89
  Bottom Layer (*.GBL) w5: v1(-1311.98,2058) -1344.59,2090.61 -1344.59,2458.61 -1310.98,2492.22 v1(-1310.98,2664)
NetS2_2: S2.2 U2.13 | length 2014.2
  Top Layer (*.GTL) w5: S2.2@-968.98,-2165 v1@-968.98,-2096
  Bottom Layer (*.GBL) w5: U2.13@-2286.66,-1551.17 -2286.66,-1754.38 -2117.98,-1923.07 -2117.98,-2064.29 -1872.27,-2310 -1808.98,-2310 -1568.98,-2070 -997.98,-2070 v1(-968.98,-2099)
NetS3_2: S3.2 U3.13 | length 1765
  Top Layer (*.GTL) w5: S3.2@3116.02,300 3116.02,213 v1(3117.02,212)
  Bottom Layer (*.GBL) w5: U3.13@2486.7,-1204.76 2614.02,-1160 2804.02,-825 2987.02,-525 3178.02,-120 3178.02,151 v1(3117.02,212)
NetS4_2: S4.2 U24.7 | length 670.2
  Top Layer (*.GTL) w5: S4.2@-387.19,-2854.33 -313.67,-2854.33 -250,-2918 -4,-2918 29,-2885 29,-2817 81,-2765 152,-2765 U24.7@153,-2764
NetTP12_1: TP12.1 U12.8 U12.9 U14.3 | length 791.8
  Top Layer (*.GTL) w5: TP12.1@1210.02,-1255 v1(1323.02,-1322)
  Bottom Layer (*.GBL) w5: v1(1323.02,-1322) U12.8@1429.92,-1174.81 U12.9@1479.92,-1088.21 1494.3,-986.28 1497.02,-978 1501.02,-969 1504.02,-959 1523.02,-938 1521.02,-904 1447.02,-856 1414.02,-858 U14.3@1380.14,-911.04
NetTP13_1: TP13.1 U13.8 U13.9 U15.3 | length 805.3
  Top Layer (*.GTL) w5: v1(407.02,1796) 441.02,1796 461.02,1816 v1(461.02,1975)
  Bottom Layer (*.GBL) w5: U15.3@96.48,1795 406.02,1795 v1(407.02,1796) ; U13.9@190.02,1970 U13.8@290.02,1970 456.02,1970 v1(461.02,1975)
NetTP15_1: TP15.1 U16.8 U16.9 U17.3 | length 714.7
  Top Layer (*.GTL) w5: v1(-1793.98,-499) TP15.1@-1699.98,-440
  Mid-Layer 1 (*.G1) w5: U16.9@-1699.88,-741.8 v1(-1455.98,-823)
  Bottom Layer (*.GBL) w5: v1(-1793.98,-499) U16.8@-1749.88,-655.2 U16.9@-1699.88,-741.8 ; U17.3@-1491.56,-748.97 -1456.98,-802 v1(-1455.98,-823)
NetU6_K: U6.K U9.A | length 1494.3
  Top Layer (*.GTL) w5: v1(557.02,2147) v1(557.02,2552)
  Bottom Layer (*.GBL) w5: U6.K@-305.1,2421.25 -151.35,2575 534.02,2575 v1(557.02,2552) ; U9.A@403.56,2145.66 555.68,2145.66 v1(557.02,2147)
NetU7_K: U7.K U10.A | length 1325
  Mid-Layer 1 (*.G1) w5: U10.A@-2059.96,-723.37 -2059.96,-667.03 -2080.98,-646 -2218.98,-646 -2331,-758.02 -2331,-1199.98 -2127.9,-1403.08 -2016.1,-1403.08 U7.K@-1944.29,-1474.88
NetU8_K: U8.K U11.A | length 1274
  Mid-Layer 1 (*.G1) w5: U11.A@1656.45,-1422.33 1656.45,-1574.44 1705.02,-1623 1963.02,-1623 2249.45,-1336.57 U8.K@2249.45,-946.4
PCB_TEMP: C31.2 R21.1 TP18.1 U18.A15 | length 3632.1
  Top Layer (*.GTL) w5: U18.A15@372.86,257.86 373.22,257.5 517.52,257.5 589.02,186 v1(589.02,-65) ; v1(1610.02,640) 1615.02,645 R21.1@1615.02,1040 C31.2@1615.02,1105 ; v1(2081.02,-66) 2083.02,-64 v1(2083.02,633)
  Bottom Layer (*.GBL) w5: v1(589.02,-65) 590.02,-66 v1(2081.02,-66) ; v1(1610.02,640) 2076.02,640 v1(2083.02,633)
POSLIMT1: R4.1 U6.C U18.B17 | length 2416
  Top Layer (*.GTL) w5: v1(-605.98,2123) -605.98,2110.52 -561.98,2066.52 -561.98,839.73 -479.98,757.73 -479.98,490.25 -485.22,485.01 -485.22,462.99 -475.98,453.75 -475.98,247 -468.98,240 -455.98,240 -454.16,238.18 U18.B17@-417.3,238.18 ; R4.1@-329.98,2065 -329.98,2086 -305.1,2110.88 U6.C@-305.1,2145.66
  Bottom Layer (*.GBL) w5: v1(-605.98,2123) -583.98,2101 -389,2101 -344.34,2145.66 U6.C@-305.1,2145.66
POSLIMT2: R5.1 U7.C U18.B15 | length 3128.1
  Top Layer (*.GTL) w5: U7.C@-1705.62,-1337.09 -1705.62,-1239.65 -1680.98,-1215 -1680.98,-848.25 -1685.91,-843.32 -1685.91,-778.78 -1602.48,-695.34 -1602.48,-478.84 -1577.98,-454.34 v1(-1577.98,109) ; U7.C@-1703.54,-1335 R5.1@-1639.98,-1335 ; U18.B15@-417.3,257.86 -302.84,257.86 -287.98,243 v1(-287.98,119)
  Bottom Layer (*.GBL) w5: v1(-1577.98,109) -896.14,109 -886.64,118.5 -871.32,118.5 -861.82,109 -483.14,109 -473.64,118.5 -288.48,118.5 v1(-287.98,119)
POSLIMT3: R6.1 U8.C U18.B13 | length 3558.3
  Top Layer (*.GTL) w5: U18.B13@-416.75,277 v1(-275.98,277) ; R6.1@1931.42,-808.61 U8.C@2010.78,-808.61 2010.78,211 v1(2013.02,211)
  Bottom Layer (*.GBL) w5: v1(-275.98,277) -259.98,261 908.75,261 958.75,211 v1(2013.02,211)
QUADA1+: U4.17 U18.A18 | length 854.2
  Top Layer (*.GTL) w5: U18.A18@129.55,238.18 85.02,238.18 80.02,243.18 80.02,498.61 438.6,857.19 U4.17@438.6,897.28
QUADA1-: U4.16 U18.A20 | length 873.2
  Top Layer (*.GTL) w5: U18.A20@129.55,218.49 85.02,218.49 71.02,232.49 71.02,502.33 418.92,850.23 U4.16@418.92,897.28
QUADA2+: U4.9 U18.A30 | length 951.8
  Top Layer (*.GTL) w5: U18.A30@129.55,120.07 85.02,120.07 26.02,179.07 26.02,520.97 281.12,776.08 U4.9@281.12,897.28
QUADA2-: U4.8 U18.A32 | length 970.8
  Top Layer (*.GTL) w5: U18.A32@129.55,100.38 85.02,100.38 17.02,168.38 17.02,524.7 261.44,769.12 U4.8@261.44,897.28
QUADA3+: U5.22 U18.A42 | length 1017.7
  Top Layer (*.GTL) w5: U5.22@-102.97,897.28 -102.97,857.19 -27.98,782.2 -27.98,114.96 85.02,1.96 U18.A42@129.55,1.96
QUADA3-: U5.20 U18.A44 | length 1053.7
  Top Layer (*.GTL) w5: U5.20@-142.34,897.28 -142.34,857.19 -36.98,751.83 -36.98,104.27 85.02,-17.73 U18.A44@129.55,-17.73
QUADB1+: U4.14 U18.A22 | length 884.1
  Top Layer (*.GTL) w5: U18.A22@129.55,198.81 85.02,198.81 62.02,221.81 62.02,506.06 379.55,823.59 U4.14@379.55,897.28
QUADB1-: U4.13 U18.A24 | length 903
  Top Layer (*.GTL) w5: U18.A24@129.55,179.12 85.02,179.12 53.02,211.12 53.02,509.79 359.86,816.63 U4.13@359.86,897.28
QUADB2+: U4.6 U18.A34 | length 981.7
  Top Layer (*.GTL) w5: U18.A34@129.55,80.7 85.02,80.7 8.02,157.7 8.02,528.43 222.07,742.48 U4.6@222.07,897.28
QUADB2-: U4.5 U18.A36 | length 1000.7
  Top Layer (*.GTL) w5: U18.A36@129.55,61.01 85.02,61.01 -0.98,147.01 -0.98,532.16 202.38,735.52 U4.5@202.38,897.28
QUADB3+: U5.19 U18.A46 | length 1081.6
  Top Layer (*.GTL) w5: U5.19@-162.03,897.28 -162.03,857.19 -45.98,741.14 -45.98,93.59 85.02,-37.41 U18.A46@129.55,-37.41
QUADB3-: U5.17 U18.A48 | length 1117.5
  Top Layer (*.GTL) w5: U5.17@-201.4,897.28 -201.4,857.19 -54.98,710.77 -54.98,82.9 85.02,-57.1 U18.A48@129.55,-57.1
SILICON_SN: U18.A83 U25.1 | length 706.5
  Top Layer (*.GTL) w5: U18.A83@372.86,-608.28 v1(453.86,-608.28) ; v1(1026,-647.65) U25.1@1063.09,-647.65
  Bottom Layer (*.GBL) w5: v1(453.86,-608.28) 493.23,-647.65 v1(1026,-647.65)
STEP1: TP4.1 U1.15 U18.B31 | length 6451.1
  Top Layer (*.GTL) w5: v1(-1531.6,2828.4) -1493.98,2790.77 -1493.98,2347 -1493.98,2124.79 v1(-1449.58,2080.39) ; v1(-928.98,2018) -928.98,2016.16 -786.98,1874.16 -786.98,1860 -786.98,1671.83 -786.98,953.73 -923.98,816.73 -923.98,441 -932.48,432.5 -932.48,148.33 -884.14,100 v1(-878.98,100) ; v1@-465.6,100.38 U18.B31@-417.3,100.38 ; U1.15@-399.98,2755.89 -399.98,2811 -364.98,2846 561.02,2846 579.02,2864 762.02,2864 795.02,2897 TP4.1@795.02,2995
  Bottom Layer (*.GBL) w5: v1(-1531.6,2828.4) -1523.12,2828.4 -1520.92,2826.2 -488.94,2826.2 U1.15@-404.39,2741.64 ; v1(-1449.58,2080.39) -1449.58,2026.33 -1430.62,2007.36 -1424.25,2001 -945.98,2001 v1(-928.98,2018) ; v1(-878.98,100) v1(-465.98,100) ; U1.15@-404.39,2758 -399.98,2758 U1.15@-399.98,2755.89
STEP2: TP5.1 U2.15 U18.B33 | length 5168.9
  Top Layer (*.GTL) w5: TP5.1@-3004.98,-900 -2928.98,-976 -2710.98,-976 -2573.98,-1113 -2573.98,-1239 -2423.16,-1389.82 -2423.16,-1502.89 -2251.78,-1674.27 -2236.77,-1674.27 -2182.04,-1729 -2103,-1729 -1789,-2043 -1652.16,-2043 -1505.8,-1896.64 -1324.27,-1896.64 -1193.82,-1766.19 -1193.82,-1554.58 -1134.24,-1494.99 -1134.24,-203.85 -1163.98,-174.11 v1(-1163.98,79) ; v1(-491.98,79) -419,79 U18.B33@-417.3,80.7
  Bottom Layer (*.GBL) w5: v1(-1163.98,79) v1(-491.98,79)
STEP3: TP6.1 U3.15 U18.B35 | length 5183.9
  Top Layer (*.GTL) w5: U18.B35@-417.3,61.01 v1(-367.98,61) ; v1@2240.02,44 2240.02,-187.19 2379.16,-326.33 2475.16,-326.33 2577,-428.17 2577,-1021.85 U3.15@2586.7,-1031.55 ; TP6.1@2265.02,-2155 v1(2300.02,-2083)
  Mid-Layer 1 (*.G1) w5: v1(2300.02,-2083) 2223.02,-1856 2313.02,-1709 2335.02,-1624 2393.02,-1512 2508.02,-1342 2511.29,-1340 2602.02,-1123 U3.15@2586.7,-1031.55
  Bottom Layer (*.GBL) w5: v1(-367.98,61) 512.02,61 529.12,43.9 2240.92,43.9 v1(2241.02,44)
STEP_RES0: U1.7 U2.7 U3.7 U18.B47 | length 12593.6
  Top Layer (*.GTL) w5: v1(-1057.98,204) -1057.98,-7.8 -1049.78,-16 -1029.98,-16 -1029.98,-1865.2 v1(-1002.58,-1892.6) ; v1(-822.98,203) -822.98,642.81 -709.98,755.81 -709.98,2147.29 -680,2177.27 -680,2425 -709.98,2454.98 -709.98,2471 v1(-660.98,2520) ; U18.B47@-417.3,-57.1 -393.35,-57.1 -342.98,-6.73 v1(-342.98,203) ; v1(1146.02,-1918) 1184.02,-1880 1734.02,-1880 1889.65,-1724.37 U3.7@2186.7,-1724.37
  Mid-Layer 1 (*.G1) w5: U2.7@-2586.66,-1031.55 -2394.98,-1031.55 -2379.98,-1016.55 -2379.98,-325.82 -2202.16,-148 -1793,-148 -1697,-52 -1697,132 v1(-1615,214) ; v1(-660.98,2520) -648.48,2532.5 -451.02,2532.5 -368.52,2615 316.02,2615 400.02,2699 U1.7@400.02,2755.89
  Bottom Layer (*.GBL) w5: v1(-1615,214) -1604,203 v1(-822.98,203) v1(-342.98,203) ; v1(-1002.58,-1892.6) 1120.62,-1892.6 v1(1146.02,-1918)
STEP_RES1: U1.8 U2.8 U3.8 U18.B51 | length 12638.5
  Top Layer (*.GTL) w5: v1(-1034.98,177) -1034.98,1.73 -1020.98,-12.27 -1020.98,-1834.6 v1(-982.78,-1872.8) ; v1(-846.98,176) -846.98,652.75 -761.07,738.66 -739.86,738.66 -720,758.52 -720,2150 -692,2178 -692,2422 -720,2450 -720,2500.57 v1(-680.78,2539.8) ; U18.B51@-417.3,-96.47 -345.45,-96.47 -318.98,-70 v1(-318.98,176) ; v1(1146.02,-1890) 1165.02,-1871 1730.29,-1871 1963.52,-1637.77 U3.8@2236.7,-1637.77
  Mid-Layer 1 (*.G1) w5: U2.8@-2536.66,-1118.16 -2394.98,-1118.16 -2370.98,-1094.16 -2370.98,-329.55 -2198.43,-157 -1789.27,-157 -1688,-55.73 -1688,113 v1(-1615,186) ; v1(-680.78,2539.8) -653.91,2539.8 -652.21,2541.5 -547.32,2541.5 -464.82,2624 225.02,2624 300.02,2699 U1.8@300.02,2755.89
  Bottom Layer (*.GBL) w5: v1(-1615,186) -1605,176 v1(-846.98,176) v1(-318.98,176) ; v1(-982.78,-1872.8) 1128.82,-1872.8 v1(1146.02,-1890)